# EAGLE board exp-ethernet-auto (EAGLE 4.11)
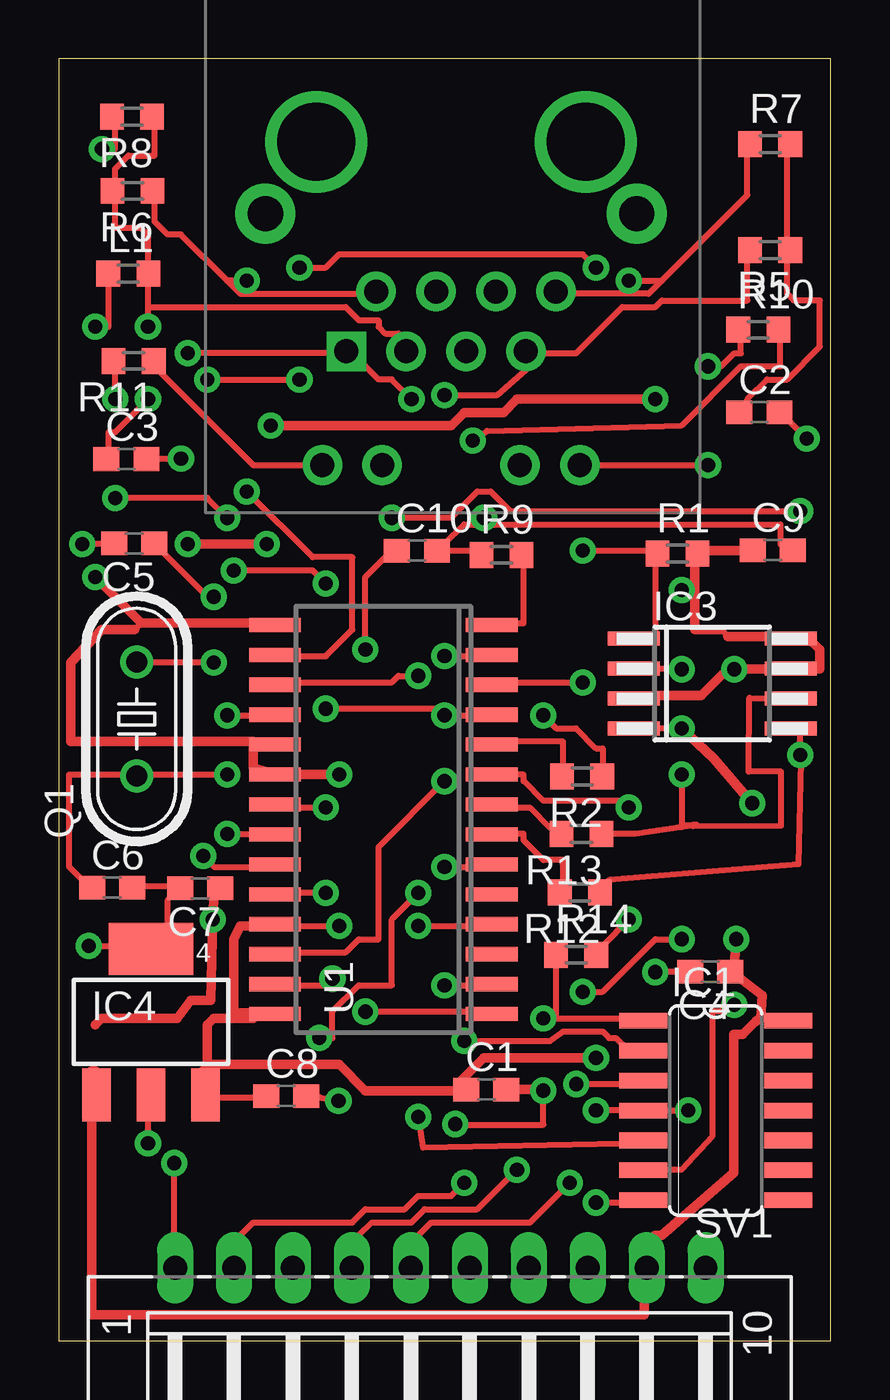
[diagram p0: board, top side]
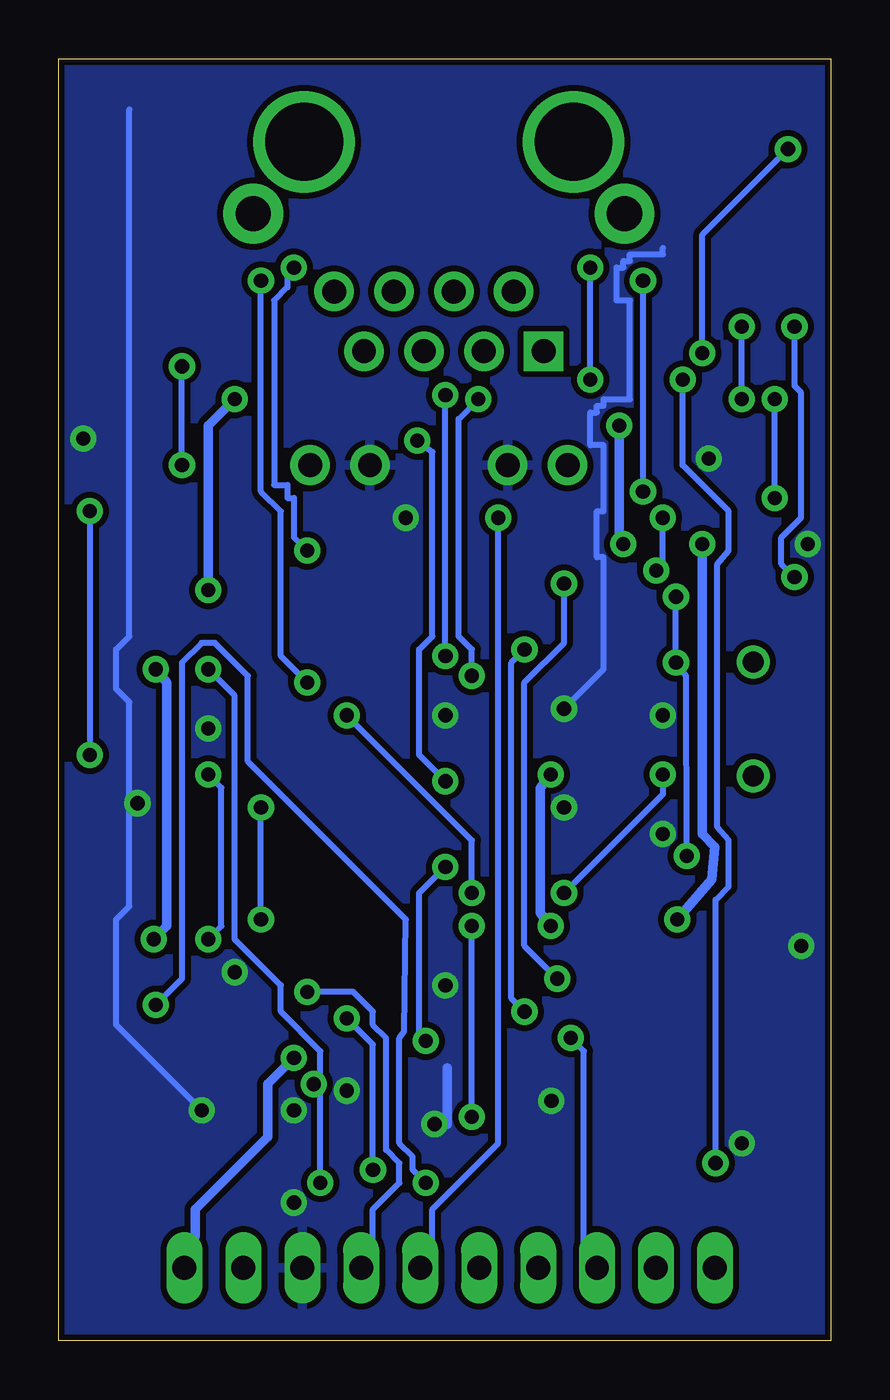
[diagram p1: board, bottom side, seen from below]

Size 32.75 x 54.38 mm. Coordinates in mm from the lower left corner, seen from the top.
Outline: 0,0 32.75,0 32.75,54.38 0,54.38 0,0
Copper layers (1*16): Top 0.035mm / dielectric 1.5mm / Bottom 0.035mm
Design rules "10mils": minimum track width 10mil, minimum drill 0.6mm, track to track 10mil, track to pad 10mil, pad to pad 10mil, via to via 10mil, smd to smd 10mil, copper to edge 10mil, drill to drill 10mil, minimum pad ring 10mil, minimum via ring 10mil, stop-mask expansion 0mil, vias tented up to drill 0mil, thermal gap 10mil

## Footprints (pad centres in the part's own frame; a part is rotated, then mirrored left to right if it is on the bottom)
C0603 = smd 1.1 x 1: 1 -0.85,0; 2 0.85,0
SO14 = smd 0.66 x 2.032: 1 -3.81,-3.073; 2 -2.54,-3.073; 3 -1.27,-3.073; 4 0,-3.073; 5 1.27,-3.073; 6 2.54,-3.073; 7 3.81,-3.073; 8 3.81,3.073; 9 2.54,3.073; 10 1.27,3.073; 11 0,3.073; 12 -1.27,3.073; 13 -2.54,3.073; 14 -3.81,3.073
SO-08M = smd 0.6 x 2.2: 1 -1.905,-3.33; 2 -0.635,-3.33; 3 0.635,-3.33; 4 1.905,-3.33; 5 1.905,3.33; 6 0.635,3.33; 7 -0.635,3.33; 8 -1.905,3.33
SOT223 = smd 1.219 x 2.235: GND 0,-3.099; IN -2.311,-3.099; OUT 2.311,-3.099 | smd 3.6 x 2.2: GND@ 0,3.099
PULSEJACK-J1A = drill 1.016 pad 1.676 square: 1 -4.445,-4.572 | drill 1.016 pad 1.676 round: 2 -3.175,-2.032; 3 -1.905,-4.572; 4 -0.635,-2.032; 5 0.635,-4.572; 6 1.905,-2.032; 7 3.175,-4.572; 8 4.445,-2.032; 9 -5.461,-9.398; 10 -2.921,-9.398; 11 2.921,-9.398; 12 5.461,-9.398 | drill 1.5 pad 2.54 round: CHS1 7.874,1.27; CHS2 -7.874,1.27 | drill 3.3 round: P$1 -5.715,4.318; P$2 5.715,4.318
R0603 = smd 1 x 1.1: 1 -0.85,0; 2 0.85,0
HC49/S = drill 0.889 round: 1 -2.413,0; 2 2.413,0
L10P = drill 1.016 long: 1 11.25,-6.25; 2 8.75,-6.25; 3 6.25,-6.25; 4 3.75,-6.25; 5 1.25,-6.25; 6 -1.25,-6.25; 7 -3.75,-6.25; 8 -6.25,-6.25; 9 -8.75,-6.25; 10 -11.25,-6.25
SO28W = smd 0.6 x 2.2: 1 -8.255,-4.6; 2 -6.985,-4.6; 3 -5.715,-4.6; 4 -4.445,-4.6; 5 -3.175,-4.6; 6 -1.905,-4.6; 7 -0.635,-4.6; 8 0.635,-4.6; 9 1.905,-4.6; 10 3.175,-4.6; 11 4.445,-4.6; 12 5.715,-4.6; 13 6.985,-4.6; 14 8.255,-4.6; 15 8.255,4.6; 16 6.985,4.6; 17 5.715,4.6; 18 4.445,4.6; 19 3.175,4.6; 20 1.905,4.6; 21 0.635,4.6; 22 -0.635,4.6; 23 -1.905,4.6; 24 -3.175,4.6; 25 -4.445,4.6; 26 -5.715,4.6; 27 -6.985,4.6; 28 -8.255,4.6

## Placement (x,y rotation side)
C1  100nF  [C0603]  18.13,10.66 0 top
C2  100nF  [C0603]  29.71,39.38 0 top
C3  100nF  [C0603]  2.87,37.4 0 top
C4  100nF  [C0603]  27.63,15.66 180 top
C5  16pF  [C0603]  3.2,33.82 180 top
C6  16pF  [C0603]  2.26,19.22 0 top
C7  100nF  [C0603]  5.99,19.19 180 top
C8  10uF  [C0603]  9.65,10.38 0 top
C9  100nF  [C0603]  30.27,33.54 0 top
C10  10uF  [C0603]  15.18,33.52 0 top
IC1  74ACT125D  [SO14]  27.86,9.77 270 top
IC3  25LC256/SM  [SO-08M]  27.71,27.88 270 top
IC4  LM2937IMP-3.3  [SOT223]  3.91,13.53 0 top
J2  [PULSEJACK-J1A]  16.63,46.55 0 top
L1  [R0603]  2.94,45.28 0 top
Q1  25Mhz  [HC49/S]  3.3,26.38 90 top
R1  10k  [R0603]  26.23,33.39 0 top
R2  200  [R0603]  22.19,23.94 180 top
R5  49.9 1%  [R0603]  30.17,46.27 180 top
R6  49.9 1%  [R0603]  3.12,48.78 180 top
R7  49.9 1%  [R0603]  30.17,50.76 0 top
R8  49.9 1%  [R0603]  3.09,51.93 180 top
R9  2k7 1%  [R0603]  18.77,33.34 0 top
R10  330  [R0603]  29.66,42.89 0 top
R11  330  [R0603]  3.17,41.57 180 top
R12  200  [R0603]  22.09,19.01 180 top
R13  200  [R0603]  22.17,21.5 180 top
R14  200  [R0603]  21.94,16.37 0 top
SV1  [L10P]  16.17,-3.16 180 top
U1  ENC28J60-SO  [SO28W]  13.76,22.11 90 top

## Library data of the parts
C1-C10 L1 R1 R2 R5-R14 = rcl
IC1 = 74xx-eu
IC3 = microchip
IC4 = lm2937
J2 = pulsejack
Q1 = crystal
SV1 = con-amp-mt
U1 = microchip-enc28j60

## Nets
3.3V: C1.1 C8.1 IC4.OUT L1.1 SV1.10 U1.15 U1.19 U1.20 U1.25 U1.28
E-CS: IC1.1 R14.1 SV1.4
E-INT: IC1.6 SV1.2
E-PRE-CS: R14.2 U1.9
E-PRE-INT: IC1.5 U1.4
E-PRE-SCK: R13.2 U1.8
E-PRE-SI: R12.2 U1.7
E-PRE-SO: IC1.2 U1.6
E-RESET: R2.1 SV1.3
E-TPIN+: J2.7 R5.2 U1.13
E-TPIN-: J2.8 R7.1 U1.12
E-TPOUT+: J2.1 R8.2 U1.17
E-TPOUT-: J2.2 R6.1 U1.16
EE-CS: IC3.1 R1.1 SV1.1
GND: C1.2 C2.2 C3.2 C4.2 C5.2 C6.2 C7.2 C8.2 C9.2 C10.2 IC1.4 IC1.7 IC3.4 IC4.GND IC4.GND@ J2.10 J2.11 R9.1 SV1.8 U1.2 U1.11 U1.18 U1.21 U1.22
LEDA: J2.9 R11.1
LEDB: J2.12 R10.1
N$1: R2.2 U1.10
N$14: C2.1 R5.1 R7.2
OSC1: C6.1 Q1.1 U1.24
OSC2: C5.1 Q1.2 U1.23
PRE-LEDA: R11.2 U1.27
PRE-LEDB: R10.2 U1.26
PRE-VCAP: C10.1 U1.1
RBIAS: R9.2 U1.14
TD-CT: C3.1 J2.3 L1.2 R6.2 R8.1
U-SCK: IC3.6 R13.1 SV1.7
U-SDI: IC1.3 IC3.2 SV1.5
U-SDO: IC3.5 R12.1 SV1.6
VCC: C4.1 C7.1 C9.1 IC1.14 IC3.3 IC3.7 IC3.8 IC4.IN R1.2 SV1.9

## Tracks (layer width: path | path; a pad name or v marks a point on that pad's centre or on a via)
3.3V  (via drill 0.6)
  Top 0.254: v1.54,43.01 2.1,43.01 2.1,44.69 L1.1 | 8.25,30.44 U1.15 | 8.25,25.13 U1.19 8.25,25.41 | C8.1 8.25,10.33 6.57,10.33 IC4.OUT 6.02,11.44 6.29,11.72 | 16.91,10.6 C1.1 16.91,10.88 | 8.25,13.68 U1.28 8.25,13.96 7.41,13.96 | 8.25,17.59 U1.25 10.21,17.59 v11.88,17.59 | 3.22,30.16 3.5,30.44
  Top 0.406: v1.54,32.4 3.5,30.44 8.25,30.44 | 8.25,25.13 8.25,24.3 U1.20 v11.88,24.02 | 16.91,10.6 13,10.6 11.88,11.72 6.29,11.72 6.29,13.4 6.57,13.68 8.25,13.68 | 8.25,17.59 7.69,17.59 7.41,17.03 7.41,13.96 | v22.78,12 18.03,12 16.91,10.88 | 3.22,30.16 1.82,30.16 0.5,28.77 0.5,25.41 8.25,25.41
  Bottom 0.254: v1.54,43.01 1.54,40.5 1.27,40.22 1.27,34.91 2.1,34.07 2.1,32.96 v1.54,32.4
  Bottom 0.406: v11.88,24.02 12.34,23.46 12.34,18.15 v11.88,17.59 | v22.78,12 23.9,10.88 23.9,8.65 26.97,5.58 26.97,4.46 SV1.10
E-CS  (via drill 0.6)
  Top 0.254: 21.1,13.68 21.1,15.91 R14.1 | 21.1,13.68 23.9,13.68 IC1.1 | v19.43,7.25 17.75,5.58 15.51,5.58 14.96,5.02 13.28,5.02 12.72,4.46 SV1.4 | v20.54,13.68 21.1,13.68
  Bottom 0.254: v19.43,7.25 19.43,12.56 v20.54,13.68
E-INT  (via drill 0.6)
  Top 0.254: v28.65,14.24 28.37,14.24 28.09,13.96 27.71,13.96 27.71,8.65 26.41,7.25 25.57,7.25 IC1.6 | v17.19,6.69 16.63,6.13 15.24,6.13 14.68,5.58 13,5.58 12.44,5.02 8.25,5.02 7.69,4.46 SV1.2
  Bottom 0.254: v28.65,14.24 27.53,15.35 27.53,28.77 26.69,29.6 26.13,29.6 24.73,28.21 24.73,24.57 18.03,17.87 18.1,13.12 18.31,12.84 18.31,8.37 17.75,7.81 17.75,7.25 v17.19,6.69
E-PRE-CS  (via drill 0.6)
  Top 0.254: v24.18,17.87 23.06,16.75 R14.2 | v24.18,22.62 23.9,22.9 20.54,22.9 19.7,23.74 19.7,24.02 U1.9
  Bottom 0.254: v24.18,17.87 v24.18,22.62
E-PRE-INT  (via drill 0.6)
  Top 0.254: v15.24,9.49 15.44,8.19 23.9,8.37 IC1.5 | v15.24,17.59 17.47,17.59 U1.4
  Bottom 0.254: v15.24,9.49 v15.24,17.59
E-PRE-SCK
  Top 0.254: R13.2 20.82,21.78 19.98,22.62 19.43,22.62 U1.8
E-PRE-SI
  Top 0.254: R12.2 21.38,19.55 21.38,20.38 20.54,20.38 19.7,21.22 19.7,21.5 19.43,21.5 U1.7
E-PRE-SO  (via drill 0.6)
  Top 0.254: v17.19,12.71 20.82,12.71 21.38,13.12 23.06,13.12 23.34,12.84 23.62,12.84 23.9,12.56 IC1.2 | v16.35,20.1 17.47,20.1 U1.6
  Bottom 0.254: v17.19,12.71 17.47,12.84 17.47,18.99 v16.35,20.1
E-RESET  (via drill 0.6)
  Top 0.254: v20.54,26.53 21.1,25.97 21.94,25.97 22.78,25.13 23.06,25.13 23.06,24.3 R2.1 | v15.24,18.99 14.12,17.87 14.12,15.07 12.72,15.07 11.6,13.96 11.6,12.84 v11.04,12.84
  Bottom 0.254: v20.54,26.53 15.24,21.22 v15.24,18.99 | v11.04,12.84 10.49,12.28 10.49,4.18 SV1.3
E-TPIN+  (via drill 0.6)
  Top 0.254: R5.2 29.2,45.81 29.2,44.13 25.57,44.13 25.29,43.85 23.9,43.85 21.94,41.9 20.54,41.9 J2.7 19.98,41.34 18.59,40.12 v16.35,40.12 | v16.35,29.04 17.47,29.04 U1.13
  Bottom 0.254: v16.35,29.04 v16.35,40.12
E-TPIN-  (via drill 0.6)
  Top 0.254: 25.57,44.97 25.01,44.41 21.66,44.41 J2.8 | 25.57,44.97 29.2,48.6 29.2,50.28 R7.1 | v22.22,27.93 19.43,27.93 U1.12 | v24.18,44.97 25.57,44.97
  Bottom 0.254: v22.22,27.93 23.34,29.04 23.34,35.19 24.18,36.03 v24.18,44.97
E-TPOUT+  (via drill 0.6)
  Top 0.254: v1.82,50.56 2.38,50.56 2.38,51.4 R8.2 | v5.46,41.9 11.6,41.9 J2.1 13,41.34 13.56,40.78 14.12,40.78 v14.96,39.94 | v15.24,28.21 14.4,28.21 14.12,27.93 10.21,27.93 U1.17
  Bottom 0.254: v1.82,50.56 5.46,46.93 v5.46,41.9 | v15.24,28.21 15.24,29.32 15.79,29.88 15.79,39.1 v14.96,39.94
E-TPOUT-  (via drill 0.6)
  Top 0.254: 7.13,44.97 7.69,44.41 12.72,44.41 J2.2 | 7.13,44.97 5.18,46.93 4.62,46.93 4.06,47.49 4.06,48.32 R6.1 | v7.97,36.03 10.77,33.24 12.44,33.24 12.44,30.16 11.32,29.04 10.21,29.04 U1.16 | v7.97,44.97 7.13,44.97
  Bottom 0.254: v7.97,36.03 v7.97,44.97
EE-CS  (via drill 0.6)
  Top 0.254: IC3.1 25.29,29.88 25.29,32.96 R1.1 25.01,33.52 v22.22,33.52 | v4.9,7.53 4.9,4.46 SV1.1 | v6.29,40.78 v10.21,40.78 | v10.21,45.53 11.32,45.53 11.88,46.09 22.22,46.09 v22.78,45.53
  Bottom 0.254: v4.9,7.53 4.9,18.71 4.34,19.27 4.34,21.22 4.82,21.78 4.82,32.96 4.34,33.52 4.34,35.19 6.29,37.15 v6.29,40.78 | v10.21,40.78 v10.21,45.53 | v22.78,45.53 23.06,45.25 23.06,44.69 23.62,44.13 23.62,36.31 23.06,36.31 23.06,35.75 22.78,35.75 22.78,34.07 v22.22,33.52
GND  (via drill 0.6, 0.61)
  Top 0.254: 18.03,34.63 17.19,34.63 16.35,33.79 C10.2 17.47,33.52 R9.1 | 18.03,34.63 30.6,34.63 30.6,33.79 C9.2 | C6.2 3.5,19.27 4.62,19.27 C7.2 4.62,18.71 4.62,17.59 IC4.GND@ 2.38,16.75 v1.27,16.75 | v11.86,10.17 11.04,10.33 C8.2 | v20.54,10.6 19.43,10.6 C1.2 | v0.99,33.79 1.82,33.79 C5.2 | v5.18,37.43 4.06,37.43 C3.2 | v25.29,15.63 26.41,15.63 C4.2 | v31.72,38.27 30.88,39.1 C2.2 | v22.78,5.85 23.9,5.85 IC1.7 | v22.78,9.77 IC1.4 v26.69,9.77 | v7.13,21.5 8.25,21.5 U1.22 | v11.32,22.62 10.21,22.62 U1.21 | v7.13,26.53 8.25,26.53 U1.18 | v16.35,15.07 17.47,15.07 U1.2 | U1.11 17.47,26.53 v16.35,26.53 16.07,26.81 v11.32,26.81 | v26.41,25.97 IC3.4 | v3.78,8.37 3.78,9.49 IC4.GND | 18.03,34.63 v18.03,34.91 | 20.54,10.66 20.54,9.16 16.81,9.16
  Top 0.406: v26.41,25.97 27.78,24.7 v29.41,22.8 | 20.54,10.66 C1.2 | v16.81,9.18 16.81,9.16
  Bottom 0.254: v11.32,26.81 9.65,28.49 9.65,33.24 9.93,33.24 9.93,35.19 9.65,35.19 9.65,37.99 10.21,37.99 10.21,39.38 9.93,39.38 9.93,39.66 9.65,39.66 9.65,39.94 8.53,39.94 8.53,44.13 9.09,44.13 9.09,45.53 8.81,45.53 8.81,45.81 8.53,45.81 8.53,46.09 7.13,46.09 7.13,46.37 | 29.76,52.24 29.76,29.88 30.32,29.32 30.32,27.65 29.76,27.09 29.76,22.82 29.76,18.43 30.32,17.87 30.32,13.4 v26.69,9.77
  Bottom 0.406: v29.41,22.8 29.76,22.8 29.76,22.82 | v16.81,9.18 16.28,9.18 16.28,11.57
  pour Bottom (isolate 0.254): -0.13,54.67 -0.13,0.09 32.63,0.09 32.63,54.67
LEDA
  Top 0.254: R11.1 4.34,41.06 8.25,37.15 J2.9
LEDB  (via drill 0.6)
  Top 0.254: v27.53,41.34 28.09,41.34 28.65,41.9 28.93,41.9 28.93,42.46 R10.1 | J2.12 v27.53,37.15
  Bottom 0.254: v27.53,37.15 v27.53,41.34
N$1
  Top 0.254: R2.2 21.38,24.3 21.38,25.41 19.43,25.41 U1.10
N$14
  Top 0.254: C2.1 29.2,39.66 29.2,39.94 30.04,40.78 30.88,40.78 32.28,42.18 32.28,44.13 31.16,44.13 30.88,44.41 30.88,45.81 R5.1 30.88,46.65 30.88,50.28 R7.2
OSC1  (via drill 0.6)
  Top 0.254: C6.1 0.99,19.55 0.43,20.1 0.43,24.02 2.66,24.02 Q1.1 3.78,24.02 v7.13,24.02 | v11.32,18.99 10.21,18.99 U1.24
  Bottom 0.254: v11.32,18.99 7.13,23.18 v7.13,24.02
OSC2  (via drill 0.6)
  Top 0.254: v6.57,31.56 6.29,31.56 4.34,33.52 C5.1 | v6.57,28.77 3.78,28.77 Q1.2 | v6.12,20.56 6.57,20.1 8.25,20.1 U1.23
  Bottom 0.254: v6.57,31.56 v6.57,28.77 6.14,28.21 v6.12,20.56
PRE-LEDA  (via drill 0.6)
  Top 0.254: v11.6,15.35 11.32,15.07 10.21,15.07 U1.27 | v11.32,32.12 10.77,32.68 v7.41,32.68 | v7.13,34.91 6.29,35.75 v2.38,35.75 | v2.38,39.94 2.38,41.06 R11.2
  Bottom 0.254: v11.6,15.35 13,16.75 13,27.93 11.32,29.6 v11.32,32.12 | v7.41,32.68 7.13,32.96 v7.13,34.91 | v2.38,35.75 v2.38,39.94
PRE-LEDB  (via drill 0.6)
  Top 0.254: v17.55,38.19 18.16,38.6 26.41,38.82 28.93,41.34 30.6,41.34 30.6,42.46 R10.2 | v16.35,23.74 13.56,20.94 13.56,17.03 12.72,17.03 12.16,16.47 10.21,16.47 U1.26
  Bottom 0.254: v17.55,38.19 16.91,37.71 16.91,29.88 17.47,29.32 17.47,24.85 v16.35,23.74
PRE-VCAP  (via drill 0.6)
  Top 0.254: v13,29.32 13,32.4 13.84,33.24 C10.1 | v13,13.96 17.47,13.96 U1.1
  Bottom 0.254: v13,29.32 13.56,28.77 13.56,14.52 v13,13.96
RBIAS
  Top 0.254: R9.2 19.7,32.96 19.7,30.44 19.43,30.44 U1.14
TD-CT  (via drill 0.6)
  Top 0.254: v3.78,39.94 2.38,38.54 2.1,38.54 2.1,37.71 C3.1 | 3.78,43.85 3.78,44.69 L1.2 3.78,45.81 3.78,46.93 3.5,47.21 2.38,47.21 2.38,48.32 R6.2 2.38,49.16 2.38,49.72 2.94,50.28 4.06,50.28 4.06,51.4 R8.1 | v3.78,43.01 3.78,43.85 | 3.78,43.85 12.16,43.85 12.72,43.29 13.56,43.29 13.56,43.01 13.84,42.74 14.4,42.74 J2.3
  Bottom 0.254: v3.78,39.94 v3.78,43.01
U-SCK  (via drill 0.6)
  Top 0.254: 27.05,21.88 24.45,21.5 R13.1 | 27.05,21.88 26.89,21.88 26.89,21.83 30.63,21.86 30.63,24.14 29.26,24.14 29.28,27.27 IC3.6 | v22.22,14.8 23.06,14.8 25.29,17.03 v26.41,17.03 | v26.41,24.02 26.41,21.88 | 26.41,21.88 26.41,21.78 | 26.41,21.88 27.05,21.88
  Bottom 0.254: v22.22,14.8 20.26,14.8 19.43,13.96 19.43,13.4 18.87,12.84 18.87,8.09 18.31,7.53 18.31,6.69 19.43,5.58 19.43,4.18 SV1.7 | v26.41,17.03 25.85,17.59 25.85,23.46 v26.41,24.02
U-SDI  (via drill 0.6)
  Top 0.254: v21.94,10.88 23.9,10.88 IC1.3 | v21.66,6.69 19.98,5.02 15.79,5.02 15.24,4.46 SV1.5 | v26.41,28.49 25.29,28.49 IC3.2
  Bottom 0.254: v21.66,6.69 21.66,10.6 v21.94,10.88 21.66,11.16 21.66,12.28 23.34,13.96 23.34,15.07 25.29,17.03 25.29,27.37 v26.41,28.49
U-SDO  (via drill 0.6)
  Top 0.254: v31.44,35.19 19.15,35.19 18.31,36.03 17.75,36.03 16.63,34.91 v14.12,34.91 | IC3.5 31.44,25.69 v31.44,24.85 31.47,24.57 31.36,20.21 23.34,19.55 R12.1
  Bottom 0.254: v31.44,35.19 v31.44,24.85 | v14.12,34.91 14.12,8.37 16.91,5.58 16.91,4.18 SV1.6
VCC  (via drill 0.6)
  Top 0.254: 6.57,18.71 C7.1 | 1.54,11.44 IC4.IN | 27.53,33.52 R1.2 26.97,32.96 | 28.93,33.52 C9.1 | 28.37,29.88 28.09,30.16 | 30.04,29.88 IC3.8 32,29.6 | v28.65,28.49 28.37,28.49 | 25.29,27.37 IC3.3 | 30.04,28.49 IC3.7 32,28.49 | 29.76,13.68 30.04,13.68 IC1.14 | 28.93,15.35 C4.1 28.65,15.91 | 26.97,31.84 v26.41,31.84
  Top 0.406: 6.57,18.71 v6.52,17.87 6.45,14.44 5.58,14.44 5.02,13.68 1.82,13.68 1.54,13.4 | 27.53,33.52 28.93,33.52 | 26.97,32.96 26.97,31.84 26.97,30.16 28.09,30.16 | 30.04,29.88 28.37,29.88 | 25.29,27.37 27.25,27.37 28.37,28.49 | v28.65,28.49 30.04,28.49 | 32,29.6 32.28,29.32 32.28,28.49 32,28.49 | 28.93,15.35 29.84,14.64 29.76,13.68 29.56,13.55 29,12.99 28.62,12.99 28.62,7.12 25.57,4.46 25.29,4.46 SV1.9 24.84,3.09 | 28.65,15.91 v28.72,17.03 | v8.81,33.79 v5.46,33.79 | v8.99,38.82 16.63,38.82 17.19,39.38 18.87,39.38 19.43,39.94 v25.29,39.94 | 1.54,11.44 1.39,11.44 1.39,1.1 24.84,1.1 24.84,3.09 | 24.84,3.09 24.84,3.11
  Bottom 0.254: 8.99,34.07 v8.81,33.79
  Bottom 0.406: v28.65,28.49 28.16,27.93 28.16,17.59 v28.72,17.03 | v6.52,17.87 5.05,19.57 4.92,20.94 5.46,21.5 v5.46,33.79 | v8.99,38.82 8.99,34.07 | v25.29,39.94 26.41,38.82 v26.41,31.84

## Text on the board
Top: 8.0x3.3 cm | 3.15x1.30 inch | För 6 stycken på ett 160x100 | Fixa slic | Större width på ström | Kolla alla komponentstorlekar | TOP | Fixa alla hål
Bottom: BOTTOM